# EAGLE board RFBoardLayoutGen0_v01.1 (EAGLE 7.2.0)
AUTHOR: Kirchschlager Raimund
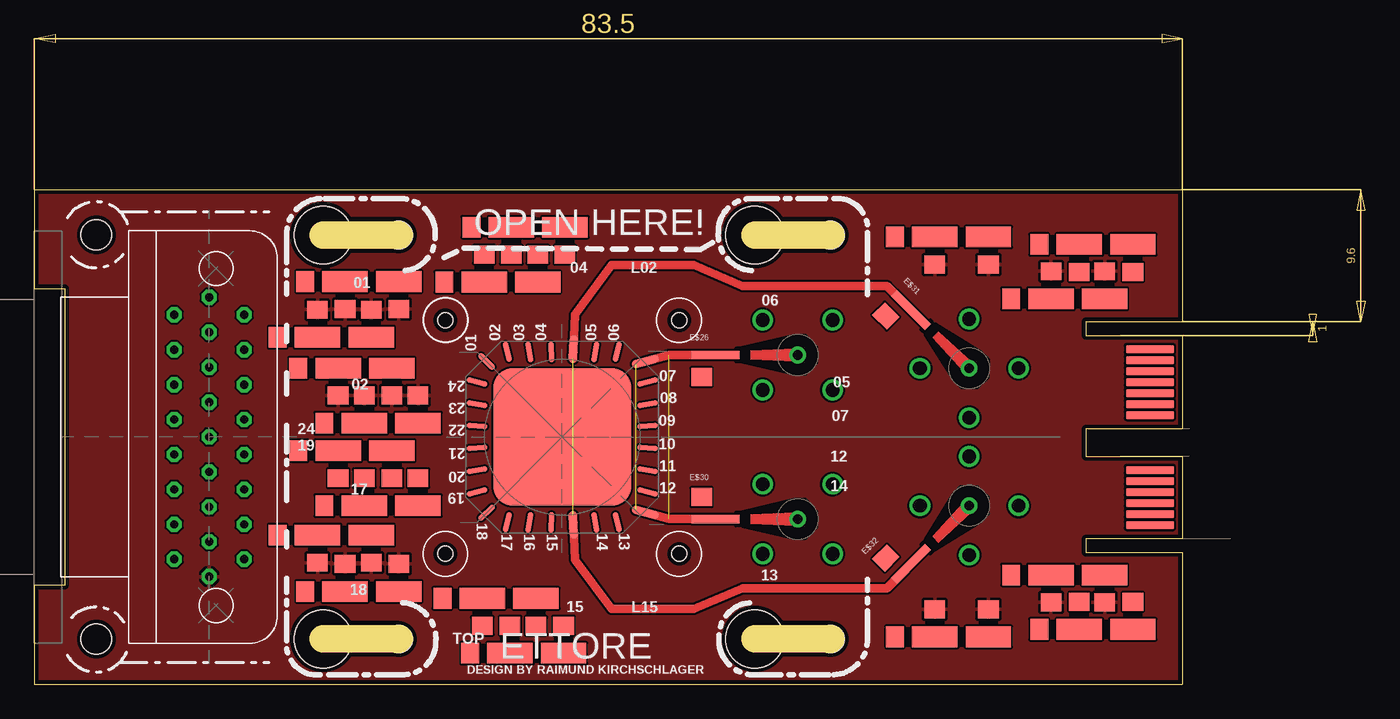
[diagram p0: board, top side]
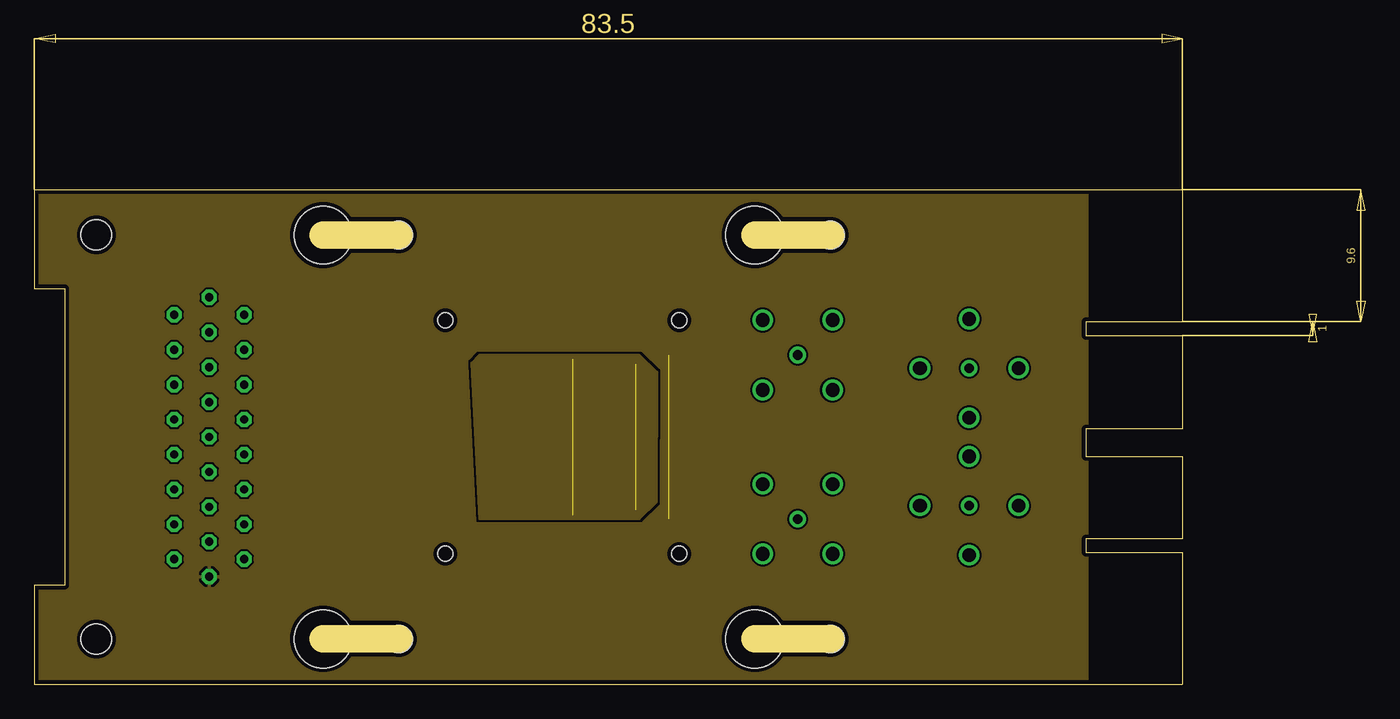
[diagram p1: board, inner layer Route2]
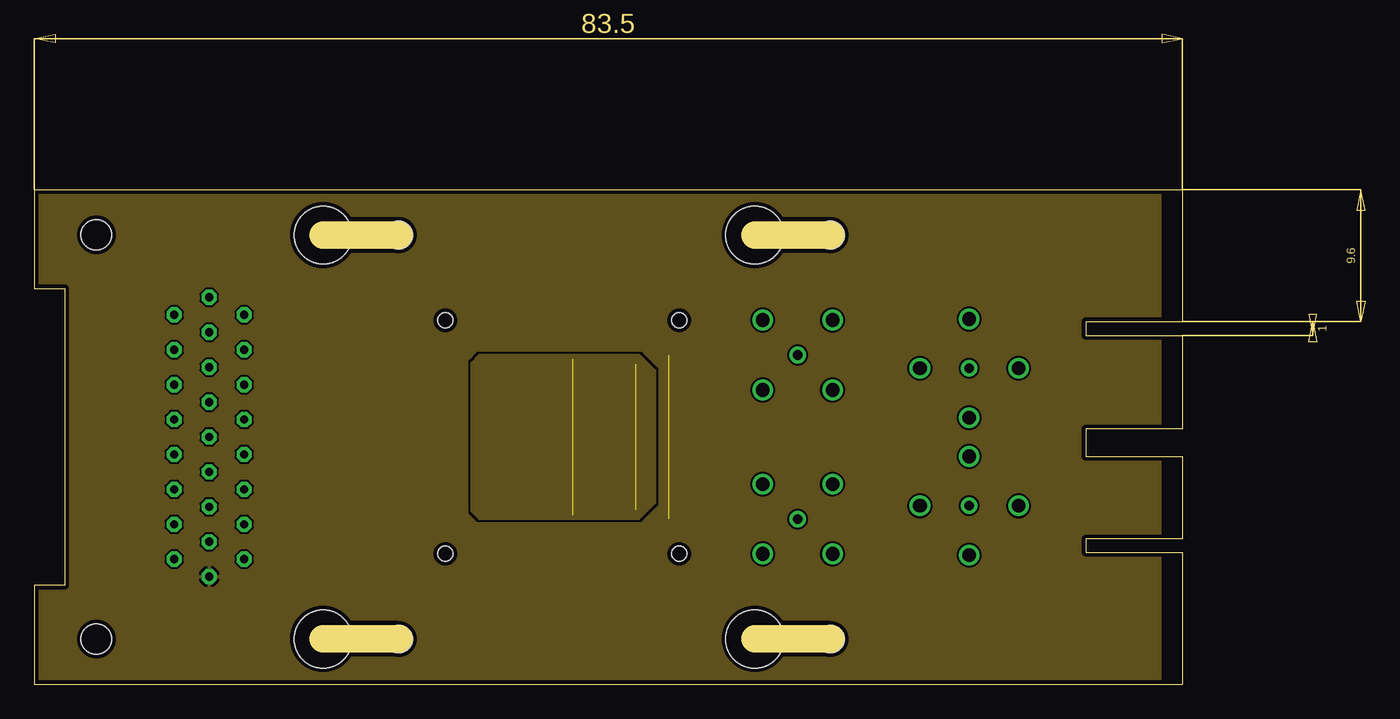
[diagram p2: board, inner layer Route15]
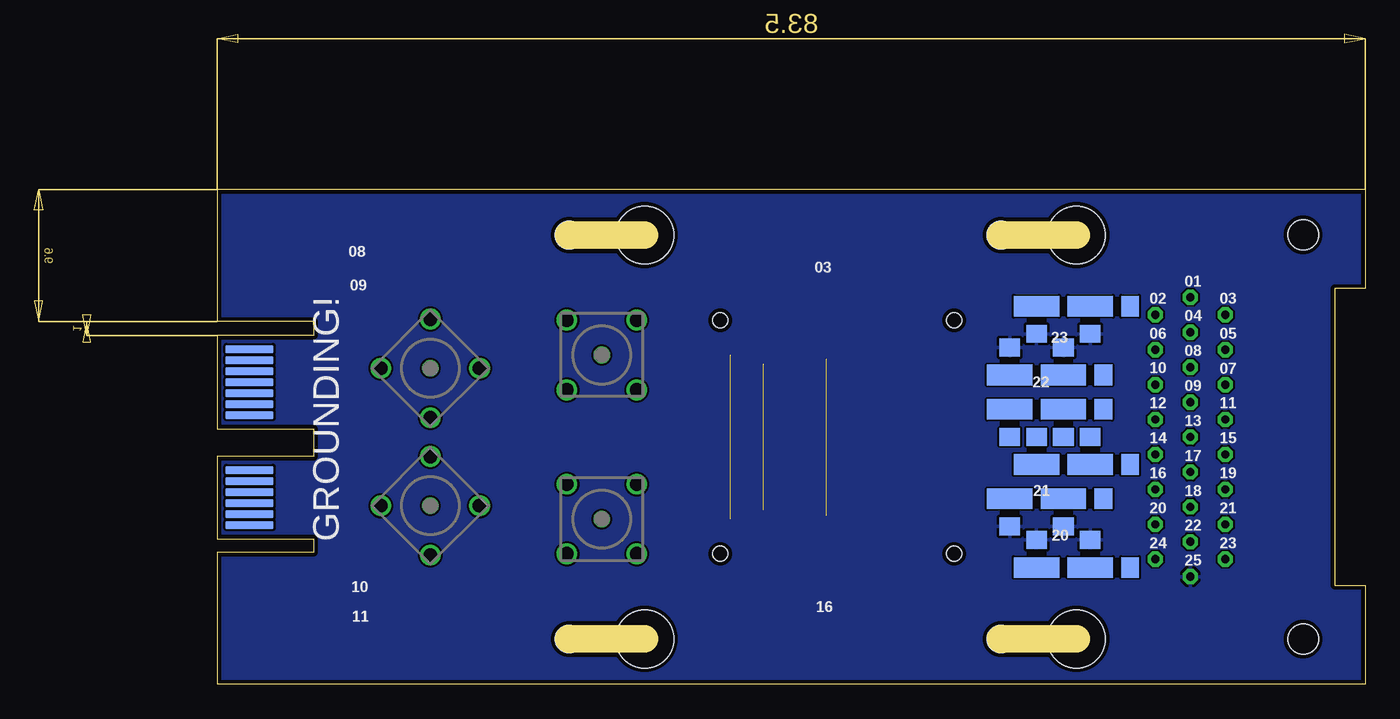
[diagram p3: board, bottom side, seen from below]

Size 83.5 x 36 mm. Coordinates in mm from the lower left corner, seen from the top.
Outline: 57.9,3.3 52.4,3.3
Outline: 26.5,3.3 21,3.3
Outline: 26.5,32.7 21,32.7
Outline: 57.9,32.7 52.4,32.7
Outline: 0,36 0,28.8 2.2,28.8 2.2,7.2 0,7.2 0,0 83.5,0 83.5,9.6 76.5,9.6 76.5,10.6 83.5,10.6 83.5,16.6 76.5,16.6 76.5,18.6 83.5,18.6 83.5,25.4 76.5,25.4 76.5,26.4 83.5,26.4 83.5,36 0,36
Copper layers (1+2*15+16): Top 0.035mm / dielectric 0.38mm / Route2 0.035mm / dielectric 0.71mm / Route15 0.035mm / dielectric 0.38mm / Bottom 0.035mm
Design rules "PCB-POOL HighSpec_ML4+ *": minimum track width 0.125mm, minimum drill 0.2mm, track to track 0.125mm, track to pad 0.125mm, pad to pad 0.125mm, via to via 0.125mm, smd to smd 0.125mm, copper to edge 0.3mm, drill to drill 0.2mm, minimum pad ring 10mil, minimum via ring 8mil, stop-mask expansion 0.075mm, vias tented up to drill 0.2mm, thermal gap 0.2mm
Net classes: 0 GND: clearance 0.15 mm; 1 RF: clearance 0.3 mm
Holes 2.2 mm at 4.5,32.7 4.5,3.3
Holes 4.2 mm at 21,3.3 21,32.7 52.4,32.7 52.4,3.3
Holes 2 mm at 26.5,32.7 26.5,3.3 57.9,32.7 57.9,3.3
Holes 1.1 mm at 29.9,26.5 46.9,26.5 46.9,9.5 29.9,9.5

## Footprints (pad centres in the part's own frame; a part is rotated, then mirrored left to right if it is on the bottom)
24DC+4RF/400MU-PADS/10.0X10.0_V1.0 = smd 10 x 10: BASE 0,0 | smd 2 x 0.6 rotated 345: P$1 6.05,-5.5 | smd 2 x 0.6 rotated 87: P$2 0.8,6.4 | smd 2 x 0.6 rotated 15: P$3 6.05,5.5 | smd 2 x 0.6 rotated 273: P$4 0.8,-6.4 | smd 1.5 x 0.4 rotated 135: P$5 -5.5,5.5 | smd 1.5 x 0.4 rotated 225: P$6 -5.5,-5.5 | smd 1.5 x 0.4 rotated 345: P$26 -6.2,4; P$37 6.2,-4 | smd 1.5 x 0.4 rotated 351: P$27 -6.2,2.4; P$36 6.2,-2.4 | smd 1.5 x 0.4 rotated 357: P$28 -6.2,0.8; P$35 6.2,-0.8 | smd 1.5 x 0.4 rotated 3: P$29 -6.2,-0.8; P$34 6.2,0.8 | smd 1.5 x 0.4 rotated 9: P$30 -6.2,-2.4; P$33 6.2,2.4 | smd 1.5 x 0.4 rotated 15: P$31 -6.2,-4; P$32 6.2,4 | smd 1.5 x 0.4 rotated 105: P$38 -4,6.2; P$49 4,-6.2 | smd 1.5 x 0.4 rotated 99: P$39 -2.4,6.2; P$48 2.4,-6.2 | smd 1.5 x 0.4 rotated 93: P$40 -0.8,6.2 | smd 1.5 x 0.4 rotated 81: P$42 2.4,6.2; P$45 -2.4,-6.2 | smd 1.5 x 0.4 rotated 75: P$43 4,6.2; P$44 -4,-6.2 | smd 1.5 x 0.4 rotated 87: P$46 -0.8,-6.2
25_SOCKET_M83513/13-D = drill 0.6 octagon: 01 10.16,0; 02 8.89,2.54; 03 6.35,2.54; 04 3.81,2.54; 05 2.54,0; 06 1.27,2.54; 07 0,0; 08 -1.27,2.54; 09 -2.54,0; 10 -3.81,2.54; 11 -6.35,2.54; 12 -8.89,2.54; 13 -10.16,0; 14 8.89,-2.54; 15 7.62,0; 16 6.35,-2.54; 17 5.08,0; 18 3.81,-2.54; 19 1.27,-2.54; 20 -1.27,-2.54; 21 -3.81,-2.54; 22 -5.08,0; 23 -6.35,-2.54; 24 -7.62,0; 25 -8.89,-2.54
MEC8-113-02-L-D-RA1 = smd 0.6 x 3.5: 129 -6.4,0.15; 130 -5.6,0.15; 131 -4.8,0.15; 132 -4,0.15; 133 -3.2,0.15; 134 -2.4,0.15; 135 -1.6,0.15; 136 2.4,0.15; 137 3.2,0.15; 138 4,0.15; 139 4.8,0.15; 140 5.6,0.15; 141 6.4,0.15 | smd 0.6 x 3.5 bottom: 157 -6.4,0.15; 158 -5.6,0.15; 159 -4.8,0.15; 160 -4,0.15; 161 -3.2,0.15; 162 -2.4,0.15; 163 -1.6,0.15; 168 2.4,0.15; 169 3.2,0.15; 170 4,0.15; 171 4.8,0.15; 172 5.6,0.15; 173 6.4,0.15
LP-FILTER/2_STAGE/OS/V6_01 = smd 1.3 x 1.5: $1 -2.9,0.01 | smd 3.3 x 1.5: $2 0,0.01; $4 3.9,0.01 | smd 1.5 x 1.3: GND@1 0,-1.99; GND@2 3.9,-1.99
LP-FILTER/2_STAGE/OS/V6_02 = smd 3.3 x 1.5: $4 0,0.01; $5 3.9,0.01 | smd 1.3 x 1.5: $6 -2.9,0.01 | smd 1.5 x 1.3: GND@3 0,2.01; GND@4 3.9,2.01
LP-FILTER/2_STAGE/OS/V6_03 = smd 3.3 x 1.5 bottom: $4 0,0.01; $5 3.9,0.01 | smd 1.3 x 1.5 bottom: $6 -2.9,0.01 | smd 1.5 x 1.3 bottom: GND@3 0,2.01; GND@4 3.9,2.01
LP-FILTER/2_STAGE/OS/V6_04 = smd 1.3 x 1.5 bottom: $1 -2.9,0.01 | smd 3.3 x 1.5 bottom: $2 0,0.01; $4 3.9,0.01 | smd 1.5 x 1.3 bottom: GND@1 0,-1.99; GND@2 3.9,-1.99
SMP_STRAIGHT_V01+BIAS_TEE_UP = drill 0.7: 1 0,0 | drill 1: 2 2.54,2.54; 3 -2.54,2.54; 4 -2.54,-2.54; 5 2.54,-2.54 | smd 1.5 x 1.3: P$1 -6.985,-1.6 | smd 3.5 x 0.6: P$2 -5.985,0
SMP_STRAIGHT_V01+BIAS_TEE_DOWN = drill 0.7: 1 0,0 | drill 1: 2 2.54,2.54; 3 -2.54,2.54; 4 -2.54,-2.54; 5 2.54,-2.54 | smd 1.5 x 1.3: P$1 -6.985,1.6 | smd 3.5 x 0.6: P$2 -5.985,0

## Placement (x,y rotation side)
E$1  [24DC+4RF/400MU-PADS/10.0X10.0_V1.0]  38.4,18 0 top
E$2  [25_SOCKET_M83513/13-D]  12.71,18 90 top
E$3  [MEC8-113-02-L-D-RA1]  81,18 270 top
E$4  [LP-FILTER/2_STAGE/OS/V6_01]  20.6,10.85 0 top
E$5  [LP-FILTER/2_STAGE/OS/V6_02]  20.6,25.25 0 top
E$6  [LP-FILTER/2_STAGE/OS/V6_01]  22.6,29.3 0 top
E$7  [LP-FILTER/2_STAGE/OS/V6_02]  22.6,6.75 0 top
E$8  [LP-FILTER/2_STAGE/OS/V6_02]  24,19 0 top
E$10  [LP-FILTER/2_STAGE/OS/V6_02]  32.72,29.27 0 top
E$11  [LP-FILTER/2_STAGE/OS/V6_01]  22.1,23 0 top
E$12  [LP-FILTER/2_STAGE/OS/V6_01]  65.5,32.55 0 top
E$13  [LP-FILTER/2_STAGE/OS/V6_01]  73.95,7.95 0 top
E$14  [LP-FILTER/2_STAGE/OS/V6_01]  22.1,17 0 top
E$15  [LP-FILTER/2_STAGE/OS/V6_02]  65.5,3.45 0 top
E$16  [SAMTEC]  27.8,41.2 0 top  (outside the outline)
E$17  [LP-FILTER/2_STAGE/OS/V6_02]  24,13 0 top
E$18  [LP-FILTER/2_STAGE/OS/V6_02]  73.95,28.05 0 top
E$19  [LP-FILTER/2_STAGE/OS/V6_01]  34.7,33.26 0 top
E$20  [LP-FILTER/2_STAGE/OS/V6_02]  34.59,2.26 0 top
E$21  [LP-FILTER/2_STAGE/OS/V6_03]  21.95,22.5 0 top
E$22  [LP-FILTER/2_STAGE/OS/V6_04]  21.95,13.5 0 top
E$23  [LP-FILTER/2_STAGE/OS/V6_04]  20,27.5 0 top
E$24  [LP-FILTER/2_STAGE/OS/V6_03]  20,8.5 0 top
E$25  [LP-FILTER/2_STAGE/OS/V6_01]  32.59,6.25 0 top
E$26  [SMP_STRAIGHT_V01+BIAS_TEE_UP]  55.52,23.97 0 top
E$30  [SMP_STRAIGHT_V01+BIAS_TEE_DOWN]  55.52,12.03 0 top
E$31  [SMP_STRAIGHT_V01+BIAS_TEE_UP]  68,23 315 top
E$32  [SMP_STRAIGHT_V01+BIAS_TEE_DOWN]  68,13 45 top
E$35  [LP-FILTER/2_STAGE/OS/V6_03]  20,16 0 top
E$36  [LP-FILTER/2_STAGE/OS/V6_04]  21.95,20 0 top
E$37  [LP-FILTER/2_STAGE/OS/V6_01]  76,32 0 top
E$38  [LP-FILTER/2_STAGE/OS/V6_02]  76,4 0 top

## Library data of the parts
E$1 = SampleArea
E$2 = Glenair
E$3 = MEC8-130-02-X-D-RA1
E$4-E$8 E$10-E$15 E$17-E$25 E$35-E$38 = LPFilter
E$16 = Samtec
E$26 E$30-E$32 = RF Connectors

## Nets
GND: E$2.13 E$4.GND@1 E$4.GND@2 E$5.GND@3 E$5.GND@4 E$6.GND@1 E$6.GND@2 E$7.GND@3 E$7.GND@4 E$8.GND@3 E$8.GND@4 E$11.GND@1 E$11.GND@2 E$12.GND@1 E$12.GND@2 E$13.GND@1 E$13.GND@2 E$15.GND@3 E$15.GND@4 E$18.GND@3 E$18.GND@4 E$21.GND@3 E$21.GND@4 E$22.GND@1 E$22.GND@2 E$23.GND@1 E$23.GND@2 E$24.GND@3 E$24.GND@4
S$1: E$1.P$36

## Tracks (layer width: path | path; a pad name or v marks a point on that pad's centre or on a via)
GND
  pour Top (rank 6): -4.85,39.6 88.1,39.7 88.1,-4.7 -4.85,-4.8
  pour Route2 (rank 6): -7.5,41.1 76.6,41.1 76.6,-5.65 -7.5,-5.65
  pour Route15 (rank 6): -11.25,44.5 81.9,44.5 81.9,-11.4 -11.25,-11.4
  pour Bottom (rank 6): -16.65,49.3 93.15,49.2 93.15,-15.85 -16.65,-15.75
S$2  (1 unrouted)
  Top 0.6: 46.17,23.97 50.8,23.97 | 46.17,12.03 50.8,12.03
S$17  (1 unrouted)
  Top 0.6: 43.76,23.31 46.17,23.97 | 43.76,12.69 46.17,12.03
S$55  (1 unrouted)
  Top 0.6: 39.17,23.69 39.33,26.93 42,30.5 48,30.5 51.5,29 62,29 64.79,26.21 | 39.17,12.31 39.33,9.07 42,5.5 48,5.5 51.5,7 62,7 64.79,9.79
S$82
  pour Route15: 31.8,23.4 32.4,24 44,24 45.15,22.85 45.15,13.2 43.95,12 32.4,12 31.8,12.6
S$165
  pour Route2: 31.8,23.4 32.4,24 44,24 45.3,22.75 45.25,13.25 44,12 32.4,12

## Text on the board
tPlace: OPEN HERE! | 04 | L02 | 01 | 06 | 02 | 05 | 07 | 24 | 19 | 12 | 17 | 14 | 13 | 18 | L15 | 15 | TOP | ETTORE | DESIGN BY RAIMUND KIRCHSCHLAGER
bPlace: 08 | 01 | 03 | 03 | 02 | 09 | 04 | 05 | 06 | 08 | 23 | 07 | 10 | 09 | 22 | 11 | 12 | 13 | 15 | 14 | 17 | 19 | 16 | 18 | 21 | 21 | 20 | 22 | 23 | 24 | 20 | GROUNDING! | 25 | 10 | 16 | 11
tDocu: 02 | 03 | 04 | 05 | 06 | 01 | 24 | 07 | 23 | 08 | 22 | 21 | 09 | 10 | 20 | 11 | 19 | 12 | 18 | 17 | 16 | 15 | 14 | 13
CopperPlate: 03